# Altium PCB AMS LATCH.PcbDoc
Units mm, origin at the board's own origin, x right, y up, seen from the top; angles counter-clockwise.
Board outline 67.79 x 81.22 mm, 2 copper layers (Top Layer, Bottom Layer); 12 components, 22 nets, 84 pads, 20 vias.
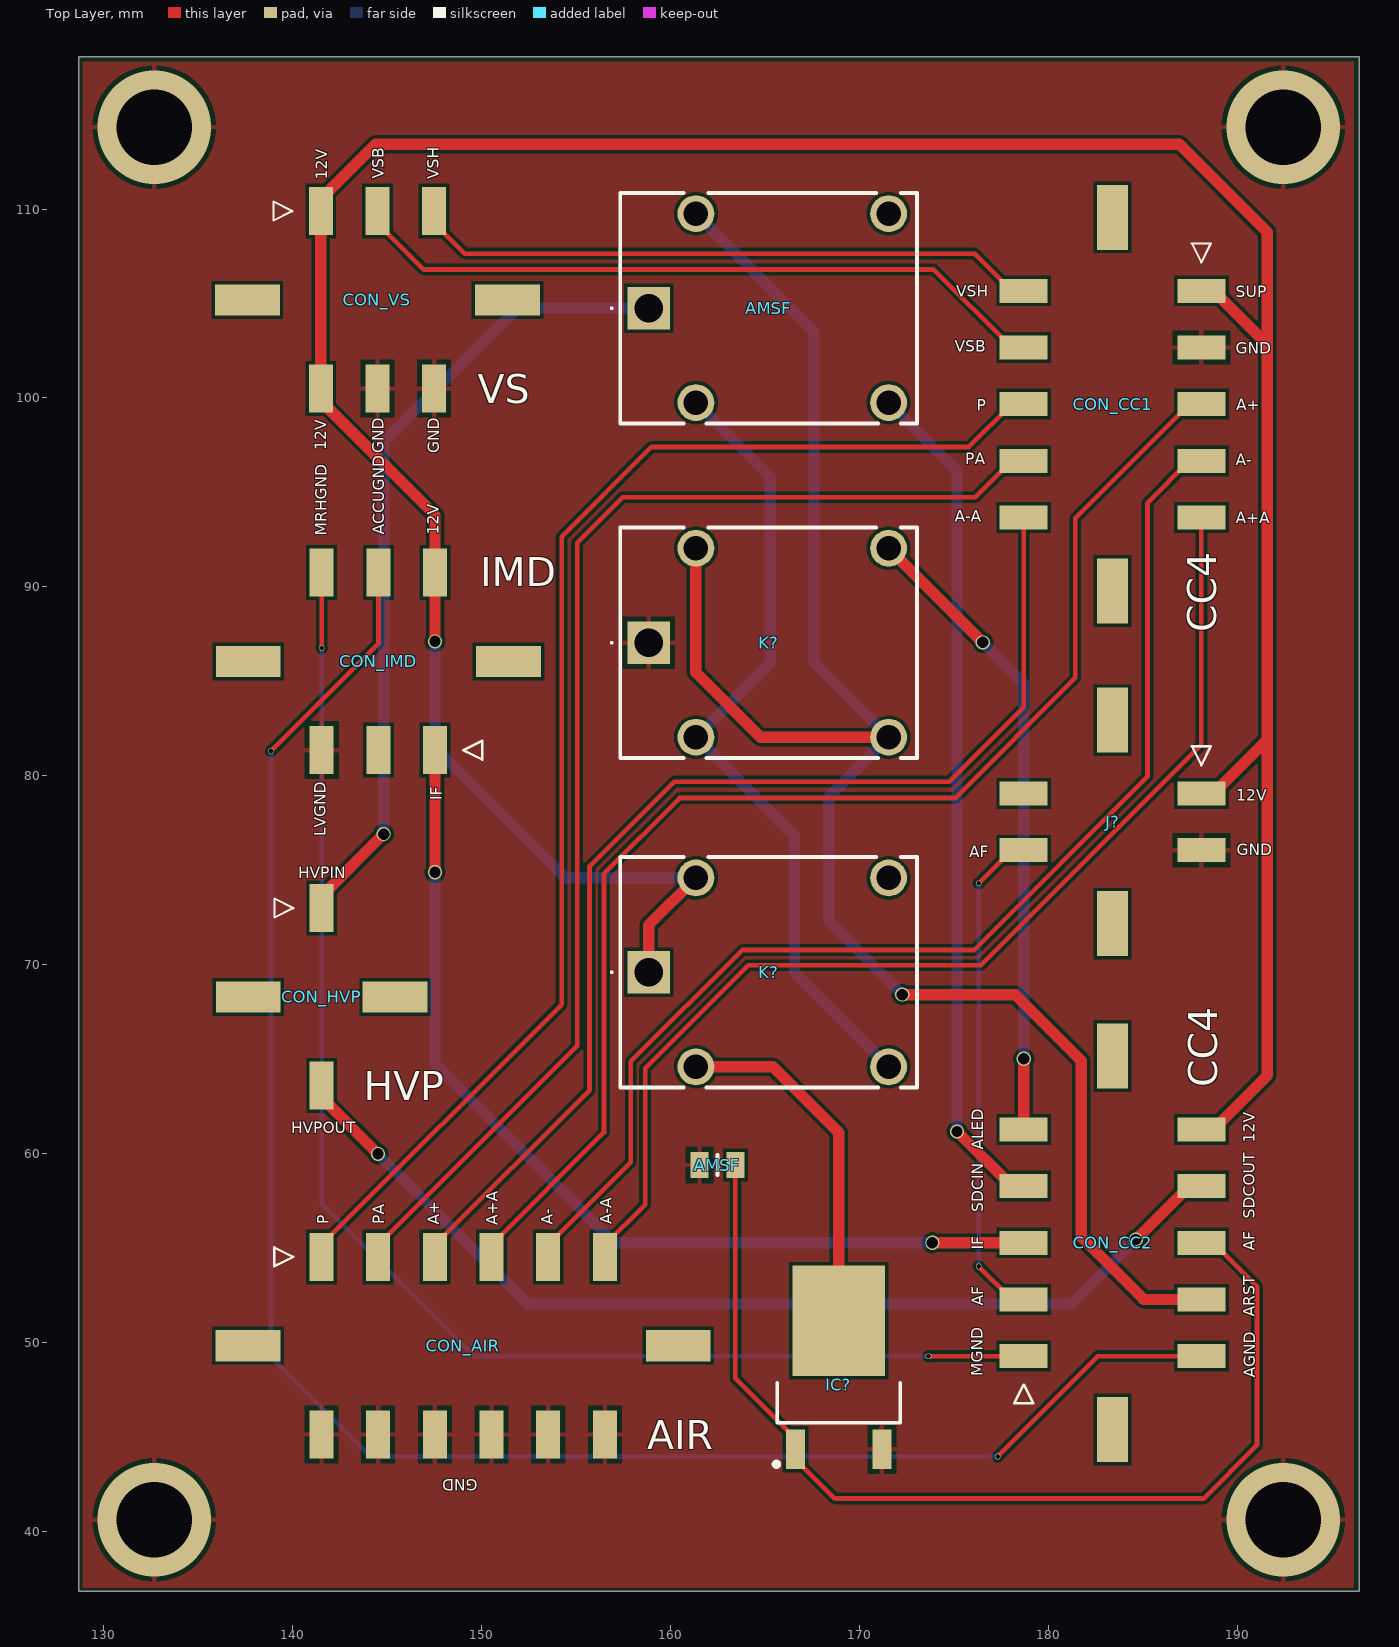
[diagram p0: Top Layer view]
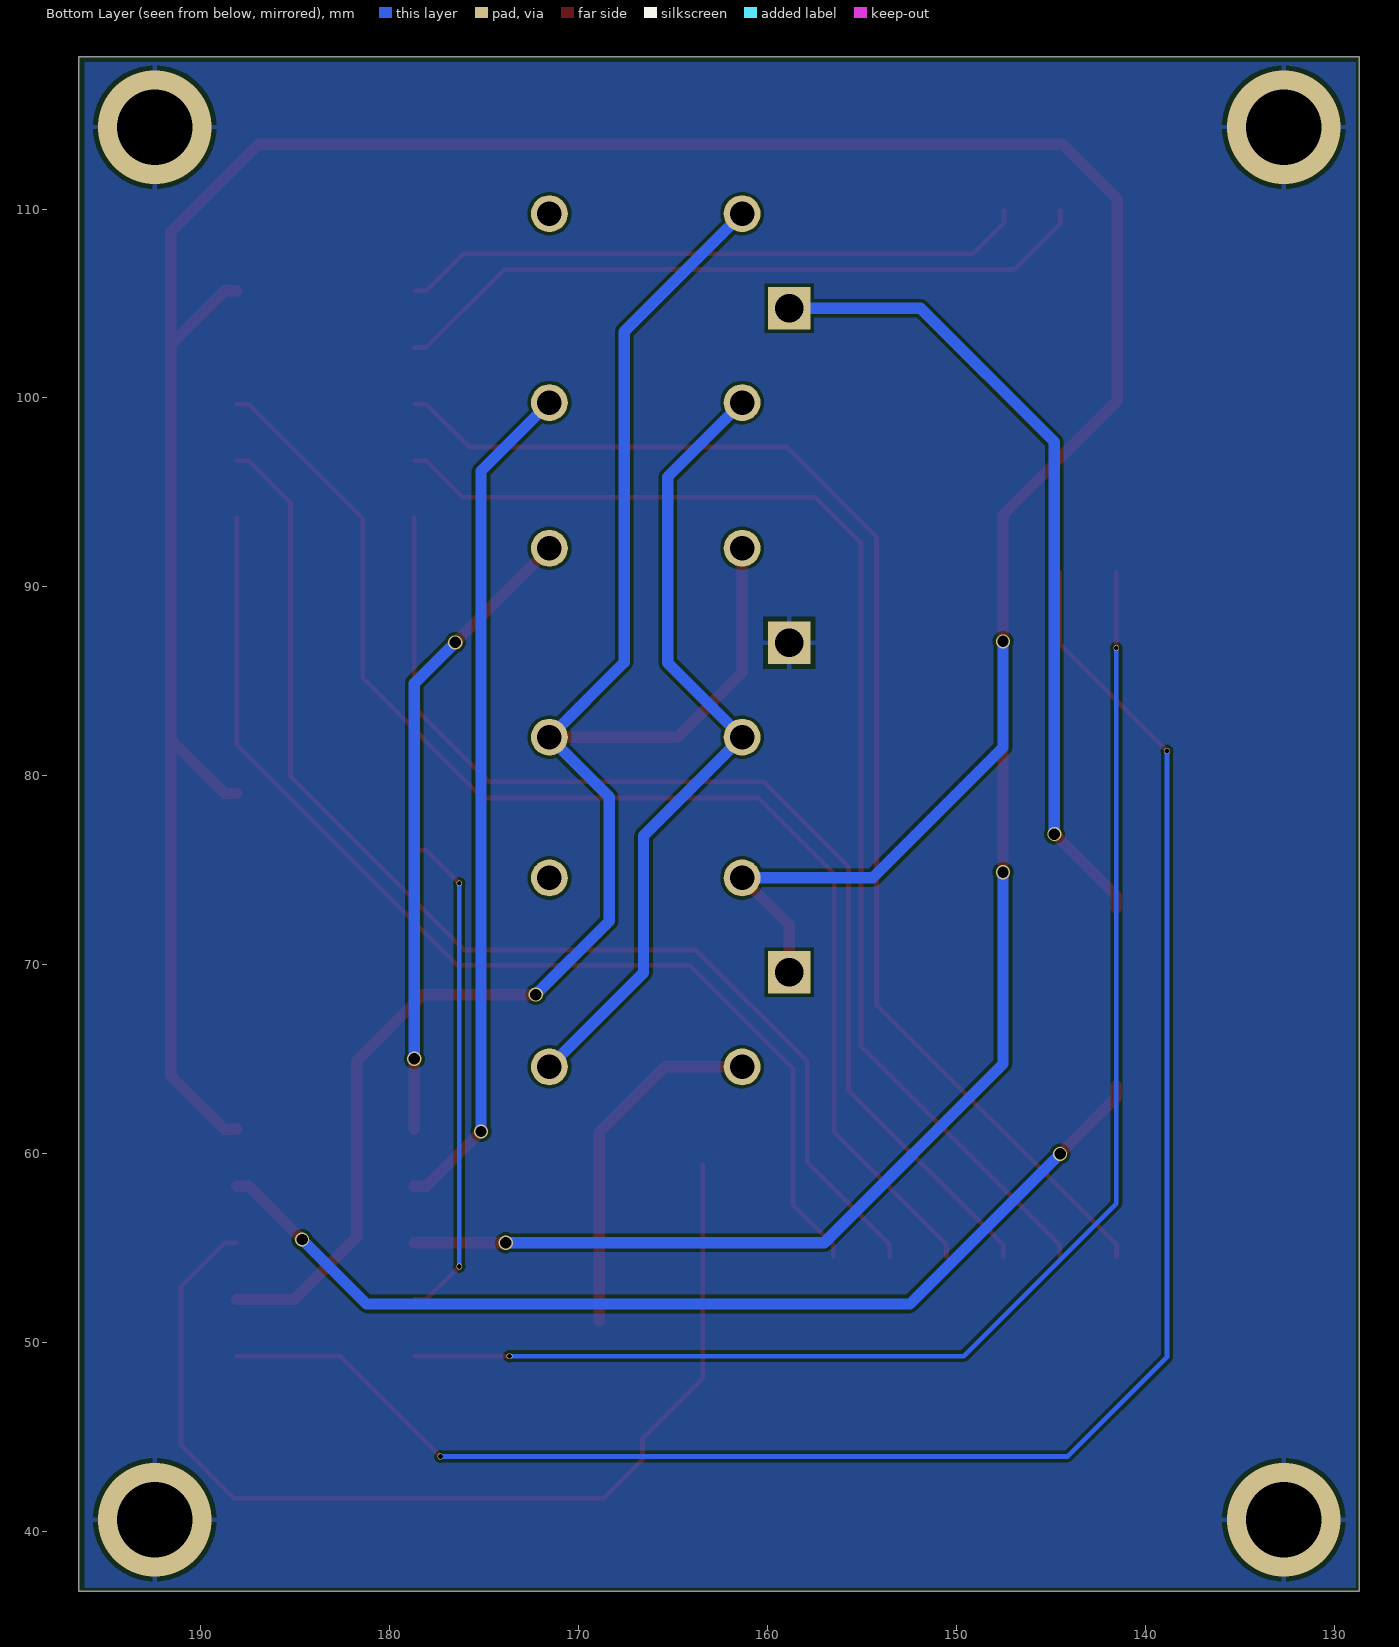
[diagram p1: Bottom Layer view, seen from below]
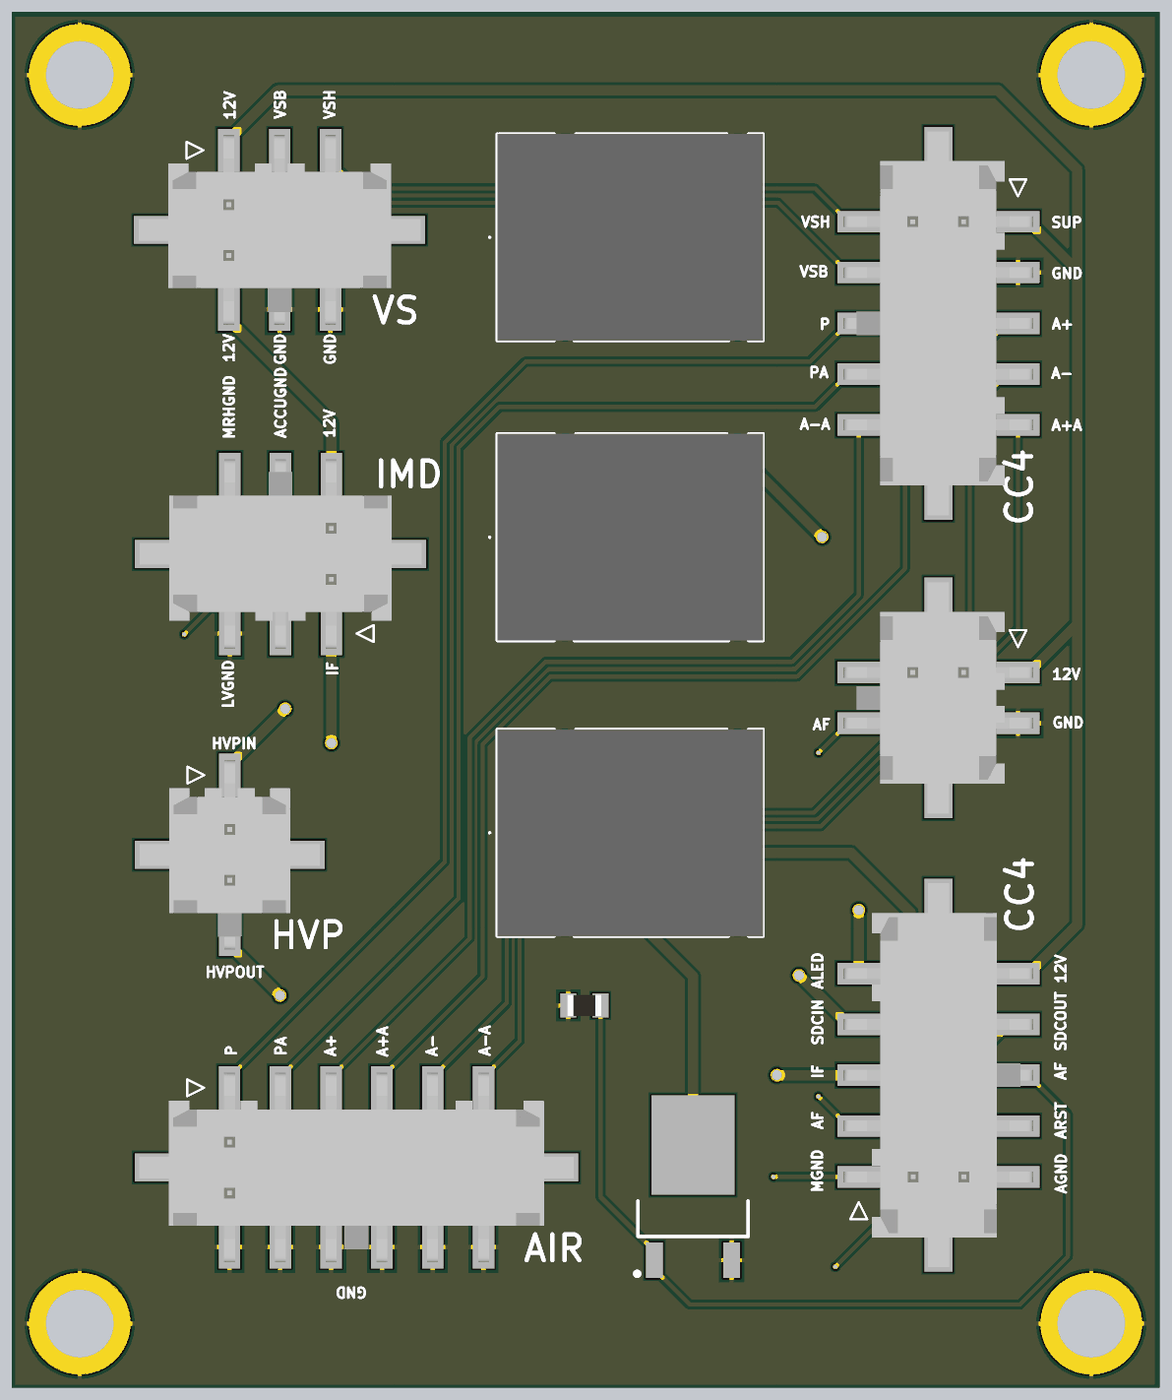
[diagram p2: 3D render of the assembled board from above, using the file's embedded part models]

## Layer stack, top to bottom
Top Solder: solder mask 0.0102, Solder Resist, Dk 3.5
Top Layer: signal copper 0.0356
Dielectric 1: dielectric 0.32, FR-4, Dk 4.8
Bottom Layer: signal copper 0.0356
Bottom Solder: solder mask 0.0102, Solder Resist, Dk 3.5

## Board outline
128.663,36.841 196.448,36.841 196.448,118.066 128.663,118.066

## Design rules (kind name [scope] priority, off if disabled: settings)
Clearance [All] p1: gap=0.17 ignorepadtopadclearanceinfootprint=FALSE
PolygonConnect [All] p1: connectstyle=Relief reliefconductorwidth=0.254 reliefentries=4 polygonreliefangle="90 Angle" airgapwidth=0.254
RoutingVias [All] p1: holewidth=0.25 width=0.3 viastyle="Through Hole" minholewidth=0.25 minwidth=0.3 maxholewidth=0.25 maxwidth=0.3
SolderMaskExpansion [All] p1: expansion=0.102 istentingtop=FALSE
Width [All] p1: maxlimit=0.6 minlimit=0.25 preferedwidth=0.25 minimp=50.000000 maximp=50.000000 favimp=50.000000
30 further rules are at their usual default settings.

## Classes and differential pairs
component class MASTER: AMSF CON_AIR CON_CC1 CON_CC2 CON_HVP CON_IMD CON_VS IC? J? K?

## Components (designator, comment, footprint, x,y, rotation, side; value= is the part's Value field where it differs from the comment)
AMSF "10k" RESC2012X60N 162.47,59.406 r0 top
AMSF "SCA20-20-12VDC-C" SCA202012VDCC 158.832,104.753 r180 top
CON_AIR "43045-1219" 43045-12YY_181920 149.016,49.845 r180 top
CON_CC1 "43045-1019" 43045-10YY_181920 183.382,99.674 r90 top
CON_CC2 "43045-1019" 43045-10YY_181920 183.382,55.29 r270 top
CON_HVP "43045-0218" 43045-02YY_181920 141.529,68.305 r180 top
CON_IMD "43045-0619" 43045-06YY_181920 144.528,86.06 r0 top
CON_VS "43045-0619" 43045-06YY_181920 144.478,105.192 r180 top
IC? "STD10NF10T4" TO228P972X240-3N 168.891,48.719 r90 top
J? "43045-0419" 43045-04YY_181920 183.382,77.565 r90 top
K? "SCA20-20-12VDC-C" SCA202012VDCC 158.832,87.047 r180 top
K? "SCA20-20-12VDC-C" SCA202012VDCC 158.832,69.602 r180 top

## Footprints (in the part's own frame and the unit in brackets; to place one, negate y for a bottom-side part, rotate by r counter-clockwise, add the part's x,y. Pads: shape width x height; smd on the part's side, far side on the other; paste and mask are expansions set on the pad)
43045-02YY_181920 [mm]
  rect 1.27x2.54 smd: 1(0,-4.7) 2(0,4.7)
  rect 3.43x1.65 smd: 3(3.885,0) 4(-3.885,0)
  silkscreen extent 1.5,-5.2 2.5,-4.2, body extent -5.33,-5.6 5.33,5.6, height 9.96
43045-04YY_181920 [mm]
  rect 1.27x2.54 smd: 1(1.5,-4.7) 2(-1.5,-4.7) 3(1.5,4.7) 4(-1.5,4.7)
  rect 3.43x1.65 smd: 5(5.385,0) 6(-5.385,0)
  silkscreen extent 3,-5.2 4,-4.2, body extent -6.83,-5.6 6.83,5.6, height 9.96
43045-06YY_181920 [mm]
  rect 1.27x2.54 smd: 1(3,-4.7) 2(0,-4.7) 3(-3,-4.7) 4(3,4.7) 5(0,4.7) 6(-3,4.7)
  rect 3.43x1.65 smd: 7(6.885,0) 8(-6.885,0)
  silkscreen extent 4.5,-5.2 5.5,-4.2, body extent -8.32,-5.6 8.32,5.6, height 9.96
43045-10YY_181920 [mm]
  rect 1.27x2.54 smd: 1(6,-4.7) 2(3,-4.7) 3(0,-4.7) 4(-3,-4.7) 5(-6,-4.7) 6(6,4.7) 7(3,4.7) 8(0,4.7) 9(-3,4.7) 10(-6,4.7)
  rect 3.43x1.65 smd: 11(9.885,0) 12(-9.885,0)
  silkscreen extent 7.5,-5.2 8.5,-4.2, body extent -11.32,-5.6 11.32,5.6, height 9.96
43045-12YY_181920 [mm]
  rect 1.27x2.54 smd: 1(7.5,-4.7) 2(4.5,-4.7) 3(1.5,-4.7) 4(-1.5,-4.7) 5(-4.5,-4.7) 6(-7.5,-4.7) 7(7.5,4.7) 8(4.5,4.7) 9(1.5,4.7) 10(-1.5,4.7) 11(-4.5,4.7) 12(-7.5,4.7)
  rect 3.43x1.65 smd: 13(11.385,0) 14(-11.385,0)
  silkscreen extent 9,-5.2 10,-4.2, body extent -12.83,-5.6 12.83,5.6, height 9.95
RESC2012X60N [mm]
  rect 0.95x1.4 smd: 1(-0.95,0) 2(0.95,0)
  silkscreen extent 0,-0.53 0,0.53, body extent -1,-0.63 1,0.63, height 0.6
SCA202012VDCC [mm]
  rect 2.25x2.25 hole 1.5: 1(0,0)
  round 1.95 hole 1.3: 2(-2.5,5) 3(-12.7,5) 4(-12.7,-5) 5(-2.5,-5)
  silkscreen extent -14.2,-6.1 2,6.1, body extent -14.2,-6.1 1.5,6.1, height 13.8
TO228P972X240-3N [mm]
  rect 2.1x1 smd: 1(-4.35,2.28) 3(-4.35,-2.28)
  rect 5.85x4.9 smd: 4(2.45,0)
  silkscreen extent -5.27,-3.25 -0.85,3.42

## Part data
AMSF: library part RC0805JR-0710KL, "Resistor", Manufacturer_Name=KEMET, Mouser Part Number=603-RC0805JR-0710KL, Arrow Part Number=RC0805JR-0710KL, Arrow Price/Stock=https://www.arrow.com/en/products/rc0805jr-0710kl/yageo, Datasheet Link=http://www.yageo.com/documents/recent/PYu-RC_Group_51_RoHS_L_10.pdf, Height=0.6mm, Manufacturer_Part_Number=RC0805JR-0710KL, Mouser Price/Stock=https://www.mouser.co.uk/ProductDetail/YAGEO/RC0805JR-0710KL?qs=ZFGQJeMQzF5q%2Fp77vM%2FrVQ%3D%3D
AMSF K? K?: "Relay or Contactor", Manufacturer_Name=LEONE, Datasheet Link=https://www.kuraelectronics.com/new-pdf/SCA%2020.pdf, Height=13.7mm, Manufacturer_Part_Number=SCA20-20-12VDC-C
CON_AIR: "Connector", Manufacturer_Name=Molex, Mouser Part Number=538-43045-1219, Datasheet Link=https://www.molex.com/pdm_docs/sd/430450218_sd.pdf, Height=9.91mm, Manufacturer_Part_Number=43045-1219, Mouser Price/Stock=https://www.mouser.co.uk/ProductDetail/Molex/43045-1219?qs=359VwiUTsp3iCU2NVYxNVg%3D%3D
CON_CC1 CON_CC2: "Connector", Manufacturer_Name=Molex, Mouser Part Number=538-43045-1019, Arrow Part Number=43045-1019, Arrow Price/Stock=https://www.arrow.com/en/products/43045-1019/molex?region=nac, Datasheet Link=https://www.molex.com/pdm_docs/sd/430450218_sd.pdf, Height=9.91mm, Manufacturer_Part_Number=43045-1019, Mouser Price/Stock=https://www.mouser.co.uk/ProductDetail/Molex/43045-1019?qs=OWQJ9aScCGICje0BO%252BCnwQ%3D%3D
CON_HVP: "Connector", Manufacturer_Name=Molex, Mouser Part Number=538-43045-0218, Arrow Part Number=43045-0218, Arrow Price/Stock=https://www.arrow.com/en/products/43045-0218/molex, Datasheet Link=https://www.molex.com/pdm_docs/sd/430450218_sd.pdf, Height=9.91mm, Manufacturer_Part_Number=43045-0218, Mouser Price/Stock=https://www.mouser.co.uk/ProductDetail/Molex/43045-0218?qs=4XSMV6Twtb2qUKINalLbdA%3D%3D
CON_IMD CON_VS: "Connector", Manufacturer_Name=Molex, Mouser Part Number=538-43045-0619, Arrow Part Number=43045-0619, Arrow Price/Stock=https://www.arrow.com/en/products/43045-0619/molex, Datasheet Link=https://www.molex.com/pdm_docs/sd/430450218_sd.pdf, Height=9.91mm, Manufacturer_Part_Number=43045-0619, Mouser Price/Stock=https://www.mouser.co.uk/ProductDetail/Molex/43045-0619?qs=KC2ywxza1kr7EVu5MuTw7g%3D%3D
IC?: "Integrated Circuit", Manufacturer_Name=STMicroelectronics, Mouser Part Number=511-STD10NF10, Arrow Part Number=STD10NF10T4, Arrow Price/Stock=https://www.arrow.com/en/products/std10nf10t4/stmicroelectronics, Datasheet Link=http://www.st.com/web/en/resource/technical/document/datasheet/CD00002133.pdf, Height=2.4mm, Manufacturer_Part_Number=STD10NF10T4, Mouser Price/Stock=https://www.mouser.co.uk/ProductDetail/STMicroelectronics/STD10NF10T4?qs=El1T93pd01%2FBh%252BX9NfIsIQ%3D%3D
J?: "Connector", Manufacturer_Name=Molex, Mouser Part Number=538-43045-0419, Datasheet Link=https://www.molex.com/pdm_docs/sd/430450218_sd.pdf, Height=9.91mm, Manufacturer_Part_Number=43045-0419, Mouser Price/Stock=https://www.mouser.co.uk/ProductDetail/Molex/43045-0419?qs=UeCeOHRHQebVNIQyI9VWWg%3D%3D

## Via types
v1: diameter 0.75, hole 0.6, Top Layer to Bottom Layer, 10 vias
v2: diameter 0.3, hole 0.25, Top Layer to Bottom Layer, 6 vias
v3: diameter 6, hole 4, Top Layer to Bottom Layer, 4 vias

## Nets (pads, with @x,y where several pads share a name; then routed paths per layer and width w, separated by ;. In a path a pad name is that pad's centre, name@x,y a point inside that pad or via, vN(x,y) a via of type N, cw(c..) or ccw(c..) an arc to the next point about the centre after c; other vN are vias at no path point)
+12: CON_CC1.1 CON_CC2.10 CON_IMD.4 CON_VS.1 CON_VS.4 J?.1 K?.1@158.832,69.602 K?.5@161.332,74.602 | length 166.1
  Top Layer w0.6: v1(147.528,87.119) CON_IMD.4 147.528,93.807 141.478,99.857 CON_VS.4 CON_VS.1 141.478,110.527 144.377,113.426 186.921,113.426 191.578,108.769 191.578,102.813 ; K?.1@158.832,69.602 158.832,72.102 K?.5@161.332,74.602 ; CON_CC2.10 188.717,61.29 191.578,64.151 191.578,81.926 ; J?.1 188.717,79.065 191.578,81.926 ; CON_CC1.1 188.717,105.674 191.578,102.813 ; 191.578,81.926 191.578,102.813
  Bottom Layer w0.6: v1(147.528,87.119) 147.528,81.5 154.426,74.602 K?.5@161.332,74.602
ACCUGND: CON_CC2.6 CON_IMD.5 | length 97.5
  Top Layer w0.25: v2(138.848,81.319) 144.528,86.999 CON_IMD.5 ; v2(177.301,43.982) 182.609,49.29 CON_CC2.6
  Bottom Layer w0.25: v2(138.848,81.319) 138.848,49.236 144.102,43.982 v2(177.301,43.982)
AF: AMSF.2@163.42,59.406 CON_CC2.8 IC?.1 | length 55.7
  Top Layer w0.25: AMSF.2@163.42,59.406 163.42,48.11 166.611,44.919 IC?.1 166.611,43.819 168.677,41.753 188.205,41.753 191.026,44.574 191.026,52.981 188.717,55.29 CON_CC2.8
AIR+VE: CON_AIR.4 CON_CC1.3 | length 69.6
  Top Layer w0.25: CON_AIR.4 150.516,55.18 156.463,61.127 156.463,74.823 160.465,78.825 175.051,78.825 181.409,85.183 181.409,93.636 187.447,99.674 CON_CC1.3
AIR-VE: CON_AIR.5 CON_CC1.4 | length 64
  Top Layer w0.25: CON_AIR.5 153.516,55.18 157.887,59.551 157.887,64.891 163.78,70.784 176.05,70.784 185.235,79.969 185.235,94.462 187.447,96.674 CON_CC1.4
AMS_FAULT: CON_CC2.2 J?.4 | length 26.5
  Top Layer w0.25: v2(176.303,54.034) 178.047,52.29 CON_CC2.2 ; v2(176.305,74.323) 178.047,76.065 J?.4
  Bottom Layer w0.25: v2(176.303,54.034) 176.305,54.036 v2(176.305,74.323)
AMS_RST: AMSF.5 CON_CC2.7 K?.3@171.532,82.047 K?.5@161.332,92.047 | length 94.7
  Top Layer w0.6: K?.5@161.332,92.047 161.332,85.468 164.753,82.047 K?.3@171.532,82.047 ; v1(172.251,68.423) 178.227,68.423 181.732,64.918 181.732,55.596 185.038,52.29 CON_CC2.7
  Bottom Layer w0.6: AMSF.5 167.58,103.505 167.58,85.999 171.532,82.047 168.357,78.872 168.357,72.317 v1(172.251,68.423)
AMSLED: CON_CC2.5 K?.4@171.532,92.047 | length 33.7
  Top Layer w0.6: K?.4@171.532,92.047 v1(176.514,87.064) ; CON_CC2.5 v1(178.682,65.034)
  Bottom Layer w0.6: v1(176.514,87.064) 178.682,84.897 v1(178.682,65.034)
AUX+ve: CON_AIR.3 CON_CC1.10 | length 60.6
  Top Layer w0.25: CON_AIR.3 147.516,55.18 155.704,63.368 155.704,75.206 160.192,79.694 174.745,79.694 178.682,83.631 CON_CC1.10
AUX-ve: CON_AIR.6 CON_CC1.5 | length 59.4
  Top Layer w0.25: CON_AIR.6 156.516,55.18 158.646,57.31 158.646,64.525 164.101,69.98 176.418,69.98 188.082,81.644 CON_CC1.5
GND: AMSF.1@161.52,59.406 CON_AIR.7 CON_AIR.8 CON_AIR.9 CON_AIR.10 CON_AIR.11 CON_AIR.12 CON_CC1.2 CON_IMD.3 CON_VS.5 CON_VS.6 IC?.3 J?.2 K?.1@158.832,87.047
  other v3: 132.668,40.627 192.415,40.627 132.668,114.337 192.415,114.337
HVP_IN: AMSF.1@158.832,104.753 CON_HVP.1 | length 43
  Top Layer w0.6: CON_HVP.1 141.529,73.64 v1(144.806,76.917)
  Bottom Layer w0.6: v1(144.806,76.917) 144.806,97.668 151.891,104.753 AMSF.1@158.832,104.753
HVP_OUT: CON_CC2.9 CON_HVP.2 | length 54.3
  Top Layer w0.6: CON_HVP.2 141.529,62.97 v1(144.504,59.995) ; v1(184.618,55.461) 187.447,58.29 CON_CC2.9
  Bottom Layer w0.6: v1(144.504,59.995) 152.448,52.051 181.208,52.051 v1(184.618,55.461)
IMD_FAULT: CON_CC2.3 CON_IMD.1 | length 51.7
  Top Layer w0.6: v1(147.528,74.897) CON_IMD.1 ; v1(173.846,55.29) CON_CC2.3
  Bottom Layer w0.6: v1(147.528,74.897) 147.528,64.752 156.99,55.29 v1(173.846,55.29)
MRHGND: CON_CC2.1 CON_IMD.6 | length 73.9
  Top Layer w0.25: v2(141.528,86.765) CON_IMD.6 ; v2(173.645,49.29) CON_CC2.1
  Bottom Layer w0.25: v2(141.528,86.765) 141.528,57.368 149.606,49.29 v2(173.645,49.29)
NetAMSF_2: AMSF.2@161.332,99.753 K?.2@161.332,82.047 K?.3@171.532,64.602 | length 42.6
  Bottom Layer w0.6: AMSF.2@161.332,99.753 165.275,95.81 165.275,85.99 161.332,82.047 166.55,76.829 166.55,69.584 K?.3@171.532,64.602
PCR: CON_AIR.1 CON_CC1.8 | length 70.7
  Top Layer w0.25: CON_AIR.1 141.516,55.18 154.226,67.89 154.226,92.653 158.982,97.409 175.782,97.409 178.047,99.674 CON_CC1.8
PCR_AUX: CON_AIR.2 CON_CC1.9 | length 67.6
  Top Layer w0.25: CON_AIR.2 144.516,55.18 155.047,65.711 155.047,92.327 157.467,94.747 176.12,94.747 178.047,96.674 CON_CC1.9
SDC_IN: AMSF.3 CON_CC2.4 | length 44.8
  Top Layer w0.6: v1(175.154,61.183) 178.047,58.29 CON_CC2.4
  Bottom Layer w0.6: AMSF.3 175.154,96.131 v1(175.154,61.183)
VS_BAT_IN: CON_CC1.7 CON_VS.2 | length 37.6
  Top Layer w0.25: CON_VS.2 144.478,109.257 146.94,106.795 173.926,106.795 178.047,102.674 CON_CC1.7
VS_HV_IN: CON_CC1.6 CON_VS.3 | length 33.3
  Top Layer w0.25: CON_VS.3 147.478,109.257 149.098,107.637 176.084,107.637 178.047,105.674 CON_CC1.6
XX: IC?.4 K?.2@161.332,64.602 | length 19
  Top Layer w0.6: K?.2@161.332,64.602 165.411,64.602 168.891,61.122 IC?.4
pads on no net: AMSF.4 CON_AIR.13 CON_AIR.14 CON_CC1.11 CON_CC1.12 CON_CC2.11 CON_CC2.12 CON_HVP.3 CON_HVP.4 CON_IMD.2 CON_IMD.7 CON_IMD.8 CON_VS.7 CON_VS.8 J?.3 J?.5 J?.6 K?.4@171.532,74.602

## Polygon pours and split planes (outlines as drawn)
GND on Top Layer "GND_L01_P001" (solid, pour order 1): 128.875,117.787 196.151,117.787 196.151,37.022 128.875,37.022
GND on Bottom Layer "GND_L02_P000" (solid, pour order 0): 128.863,117.778 196.128,117.778 196.128,37.031 128.863,37.031

## Silkscreen, mask and mechanical layers (free items; w line width, h text height)
Top Overlay:
  text "VSB" at 144.799,111.596 h0.6 r90
  text "VSH" at 147.724,111.571 h0.6 r90
  text "12V" at 141.824,111.546 h0.6 r90
  text "VSH" at 175.119,105.364 h0.6
  text "SUP" at 189.896,105.338 h0.6
  text "VSB" at 175.03,102.442 h0.6
  text "GND" at 189.896,102.338 h0.6
  text "VS" at 149.782,99.718 h1.52
  text "P" at 176.208,99.334 h0.6
  text "A+" at 189.926,99.348 h0.6
  text "12V" at 141.774,97.221 h0.6 r90
  text "GND" at 144.799,97.071 h0.6 r90
  text "GND" at 147.749,97.071 h0.6 r90
  text "PA" at 175.596,96.485 h0.6
  text "A-" at 189.896,96.438 h0.6
  text "A-A" at 175.042,93.437 h0.6
  text "A+A" at 189.913,93.377 h0.6
  text "ACCUGND" at 144.828,92.75 h0.6 r90
  text "12V" at 147.714,92.766 h0.6 r90
  text "MRHGND" at 141.784,92.696 h0.6 r90
  text "IMD" at 149.931,90.043 h1.52
  text "CC4" at 188.875,87.591 h1.52 r90
  text "IF" at 147.894,78.716 h0.6 r90
  text "12V" at 189.941,78.672 h0.6
  text "LVGND" at 141.734,76.796 h0.6 r90
  text "GND" at 189.964,75.812 h0.6
  text "AF" at 175.799,75.696 h0.6
  text "HVPIN" at 140.298,74.579 h0.6
  text "CC4" at 188.916,63.528 h1.52 r90
  text "HVP" at 143.763,62.834 h1.52
  text "HVPOUT" at 139.923,61.079 h0.6
  text "12V" at 190.907,60.572 h0.6 r90
  text "ALED" at 176.542,60.219 h0.6 r90
  text "SDCIN" at 176.552,56.904 h0.6 r90
  text "SDCOUT" at 190.902,56.557 h0.6 r90
  text "P" at 141.912,56.274 h0.6 r90
  text "PA" at 144.837,56.274 h0.6 r90
  text "A-A" at 156.887,56.274 h0.6 r90
  text "A+" at 147.762,56.249 h0.6 r90
  text "A-" at 153.762,56.249 h0.6 r90
  text "A+A" at 150.837,56.224 h0.6 r90
  text "IF" at 176.552,54.934 h0.6 r90
  text "AF" at 190.896,54.859 h0.6 r90
  text "AF" at 176.542,51.947 h0.6 r90
  text "ARST" at 190.909,51.374 h0.6 r90
  text "MGND" at 176.523,48.22 h0.6 r90
  text "AGND" at 190.922,48.151 h0.6 r90
  text "AIR" at 158.747,44.356 h1.52
  text "GND" at 149.787,42.766 h0.6 r180